# Altium PCB Mictor38AdapterBoard V2.PcbDoc
Units mil, origin at the board's own origin, x right, y up, seen from the top; angles counter-clockwise.
Board outline 1740 x 1180 mil, 2 copper layers (Top Layer, Bottom Layer); 4 components, 38 nets, 106 pads, 47 vias.
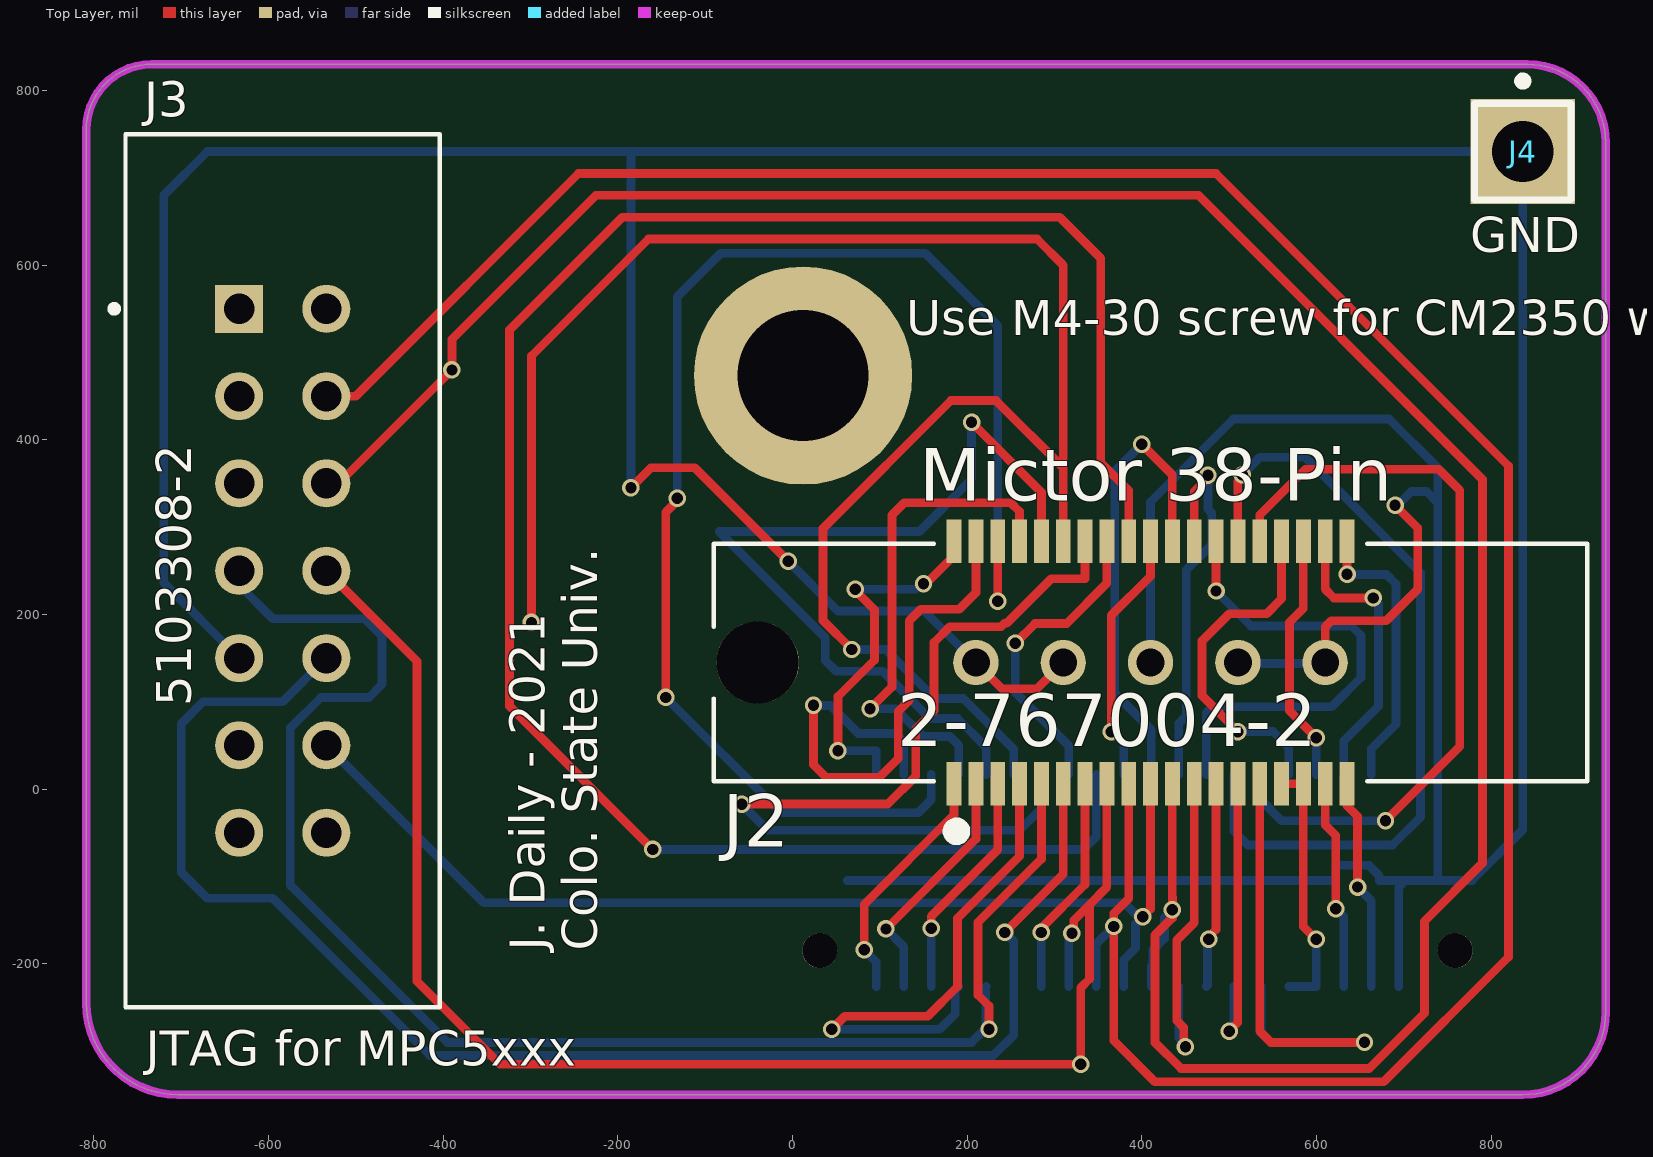
[diagram p0: Top Layer view]
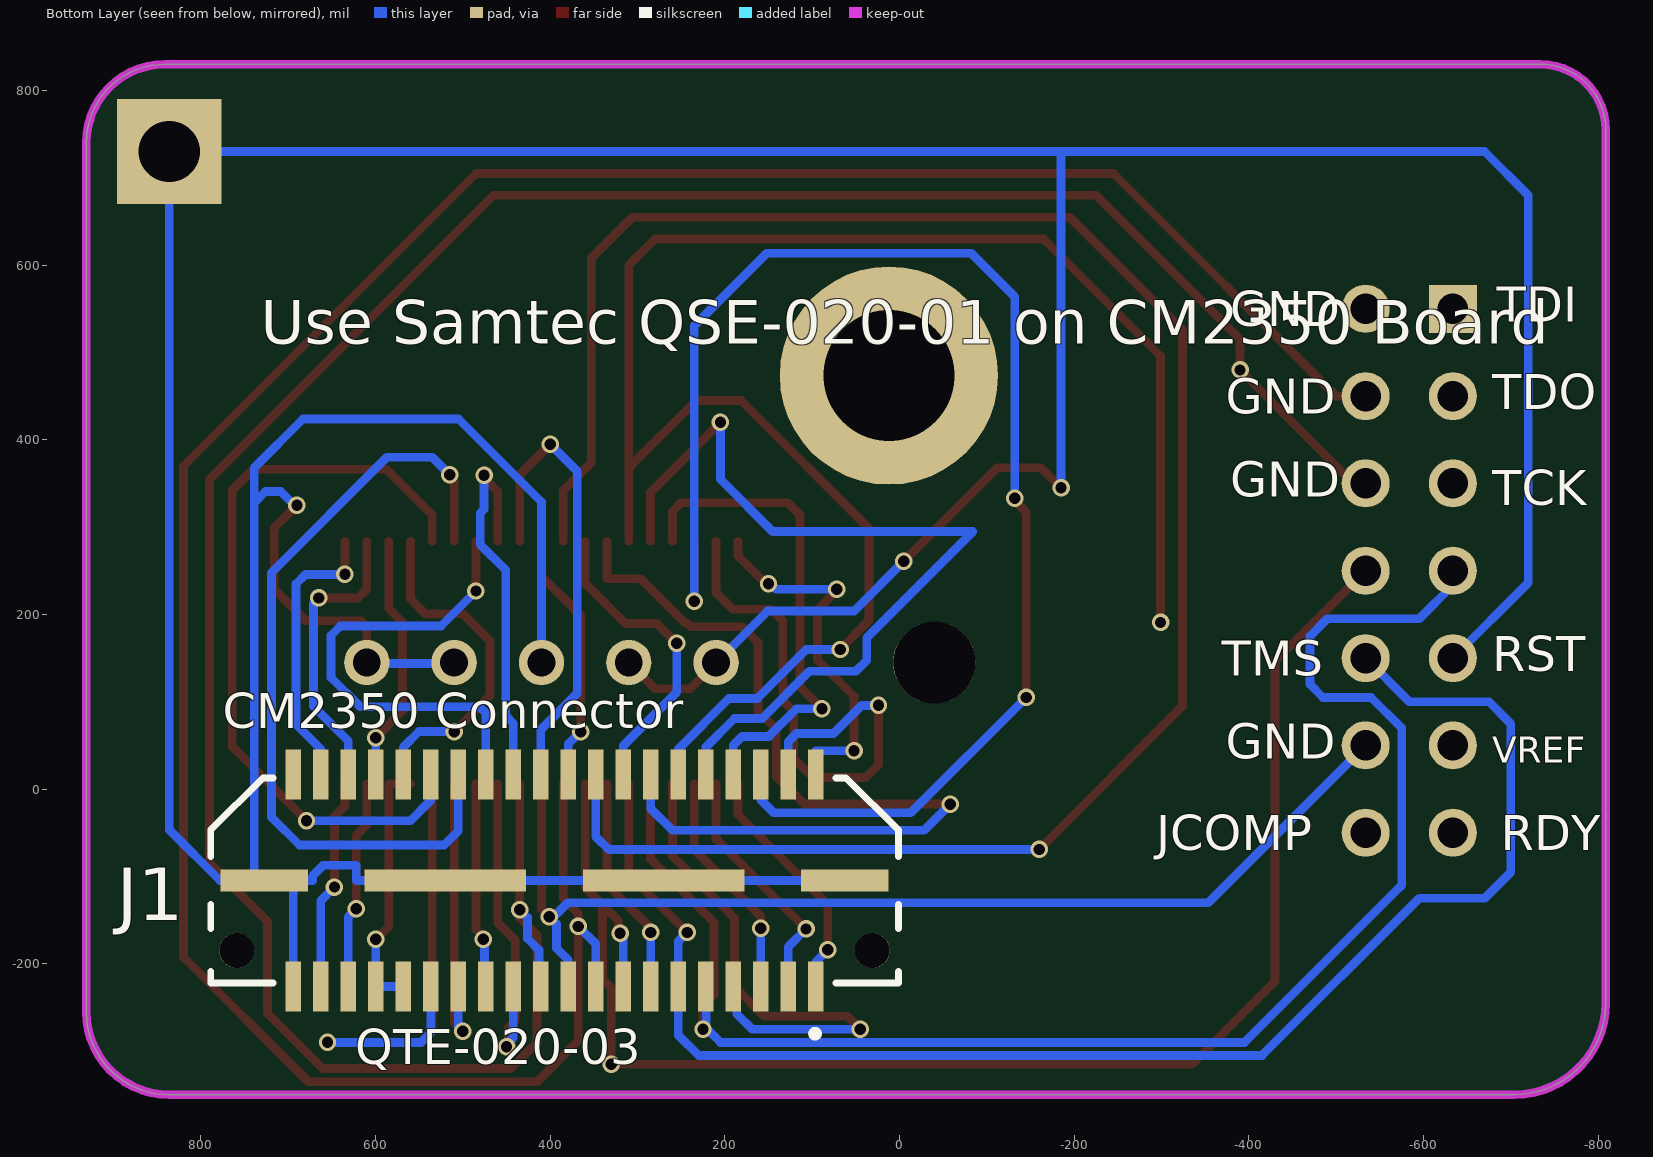
[diagram p1: Bottom Layer view, seen from below]

## Layer stack, top to bottom
Top Solder: solder mask 0.4, Solder Resist, Dk 3.5
Top Layer: signal copper 1.4
Dielectric 1: dielectric 12.6, FR-4, Dk 4.8
Bottom Layer: signal copper 1.4
Bottom Solder: solder mask 0.4, Solder Resist, Dk 3.5

## Board outline
-808.74,-244.92 -808.74,755.08 cw(c-733.74,755.08) -733.74,830.08 841.26,830.08 cw(c841.26,740.08) 931.26,740.08 931.26,-254.92 cw(c836.26,-254.92) 836.26,-349.92 -703.74,-349.92 cw(c-703.74,-244.92)

## Design rules (kind name [scope] priority, off if disabled: settings)
Clearance [All] p1: gap=10 ignorepadtopadclearanceinfootprint=FALSE except(0: Arc-Hole Track-Hole SMDPad-Hole THPad-Hole Via-Hole Fill-Hole Poly-Hole Region-Hole Text-Hole)
PolygonConnect [All] p1: connectstyle=Relief reliefconductorwidth=10 reliefentries=4 polygonreliefangle="90 Angle" airgapwidth=10
RoutingVias [All] p1: holewidth=13 width=20 viastyle="Through Hole" minholewidth=9 minwidth=20 maxholewidth=150 maxwidth=200
SolderMaskExpansion [All] p1: expansion=4 istentingtop=FALSE
Width [All] p1: maxlimit=10 minlimit=10 preferedwidth=10
30 further rules are at their usual default settings.

## Classes and differential pairs
component class Mictor38AdapterSchematic: J1 J2 J4

## Components (designator, comment, footprint, x,y, rotation, side; value= is the part's Value field where it differs from the comment)
J1 "QTE-020-03" SAMTEC_QTE-020-03-X-D-A-K-XX 395.04,-104.61 r0 bottom locked
J2 "2-767004-2" TE_2-767004-2 410,145 r90 top
J3 "5103308-2" TE_5103308-2 -633.74,550.08 r90 top
J4 "Socket" PIN1 836.26,730.08 r0 top

## Footprints (in the part's own frame and the unit in brackets; to place one, negate y for a bottom-side part, rotate by r counter-clockwise, add the part's x,y. Pads: shape width x height; smd on the part's side, far side on the other; paste and mask are expansions set on the pad)
PIN1 [mil] "Connector; Plug"
  rect 120x120 hole 70: 1(0,0)
  silkscreen extent -55,-55 55,86
SAMTEC_QTE-020-03-X-D-A-K-XX [mm]
  rect 0.46x1.45 smd: 01(-7.6,3.085) 02(-7.6,-3.085) 03(-6.8,3.085) 04(-6.8,-3.085) 05(-6,3.085) 06(-6,-3.085) 07(-5.2,3.085) 08(-5.2,-3.085) 09(-4.4,3.085) 10(-4.4,-3.085) 11(-3.6,3.085) 12(-3.6,-3.085) 13(-2.8,3.085) 14(-2.8,-3.085) 15(-2,3.085) 16(-2,-3.085) 17(-1.2,3.085) 18(-1.2,-3.085) 19(-0.4,3.085) 20(-0.4,-3.085) 21(0.4,3.085) 22(0.4,-3.085) 23(1.2,3.085) 24(1.2,-3.085) 25(2,3.085) 26(2,-3.085) 27(2.8,3.085) 28(2.8,-3.085) 29(3.6,3.085) 30(3.6,-3.085) 31(4.4,3.085) 32(4.4,-3.085) 33(5.2,3.085) 34(5.2,-3.085) 35(6,3.085) 36(6,-3.085) 37(6.8,3.085) 38(6.8,-3.085) "39: GND"(7.6,3.085) "40: GND"(7.6,-3.085)
  rect 2.54x0.64 smd: G1(-8.445,0) G4(8.445,0)
  rect 4.7x0.64 smd: G2(-3.175,0) G3(3.175,0)
  round 1.02 hole 1.02 unplated: ""(-9.24,2.04) ""(9.24,2.04)
  silkscreen extent -10,-2.98 10,4.56
TE_2-767004-2 [mm]
  rect 1.27x0.43 smd: 1(-3.53,5.715) 2(3.53,5.715) 3(-3.53,5.08) 4(3.53,5.08) 5(-3.53,4.445) 6(3.53,4.445) 7(-3.53,3.81) 8(3.53,3.81) 9(-3.53,3.175) 10(3.53,3.175) 11(-3.53,2.54) 12(3.53,2.54) 13(-3.53,1.905) 14(3.53,1.905) 15(-3.53,1.27) 16(3.53,1.27) 17(-3.53,0.635) 18(3.53,0.635) 19(-3.53,0) 20(3.53,0) 21(-3.53,-0.635) 22(3.53,-0.635) 23(-3.53,-1.27) 24(3.53,-1.27) 25(-3.53,-1.905) 26(3.53,-1.905) 27(-3.53,-2.54) 28(3.53,-2.54) 29(-3.53,-3.175) 30(3.53,-3.175) 31(-3.53,-3.81) 32(3.53,-3.81) 33(-3.53,-4.445) 34(3.53,-4.445) 35(-3.53,-5.08) 36(3.53,-5.08) 37(-3.53,-5.715) 38(3.53,-5.715)
  round 1.318 hole 0.81: G1(0,5.08) G2(0,2.54) G3(0,0) G4(0,-2.54) G5(0,-5.08)
  round 2.39 hole 2.39 unplated: ""(0,11.43)
  silkscreen extent -5.11,-12.7 3.46,12.7
TE_5103308-2 [mil]
  rect 55x55 hole 35: 1(0,0)
  round 55 hole 35: 2(0,-100) 3(-100,0) 4(-100,-100) 5(-200,0) 6(-200,-100) 7(-300,0) 8(-300,-100) 9(-400,0) 10(-400,-100) 11(-500,0) 12(-500,-100) 13(-600,0) 14(-600,-100)
  silkscreen extent -800,-230 200,147

## Part data
J1: library part QTE-020-03-X-D-A-K-XX, "40 Position Connector Header, Outer Shroud Contacts Surface Mount Gold", Package=None, Availability="In Stock", Check_prices=https://www.snapeda.com/parts/QTE-020-03-F-D-A-K-TR/Samtec/view-part/3359767/?ref=eda, MF=Samtec, MP=QTE-020-03-F-D-A-K-TR, Price=None, Purchase-URL=https://pricing.snapeda.com/search/part/QTE-020-03-F-D-A-K-TR/?ref=eda, SnapEDA_Link=https://www.snapeda.com/parts/QTE-020-03-F-D-A-K-TR/Samtec/view-part/3359767/?ref=snap
J2: "Conn High Speed Fine Pitch Connector RCP 38 POS 2.54mm/0.64mm Solder ST Thru-Hole/SMD Automotive Tube", Package=None, Centerline_Pitch=.64, Digi-Key_Part_Number=A29126-ND, Digi-Key_Purchase_URL=https://www.digikey.com/product-detail/en/te-connectivity-amp-connectors/2-767004-2/A29126-ND/299338?utm_source=snapeda&utm_medium=aggregator&utm_campaign=symbol, EU_RoHS_Compliance="Not Compliant", MF="TE Connectivity", MP=2-767004-2, Number_of_Positions=38, Product_Type=Connector, SnapEDA_Link=https://www.snapeda.com/parts/2-767004-2/TE%20Connectivity%20AMP%20Connectors/view-part/511554/?ref=snap, TE_purchase_URL=https://www.te.com/usa-en/product-2-767004-2.html?te_bu=Cor&te_type=disp&te_campaign=seda_glo_cor-seda-global-disp-prtnr-fy19-seda-model-bom-cta_sma-317_1&elqCampaignId=32493
J3: "Header;  Pin;  Vertical;  Copper Alloy;  Thermoplastic;  14;  0.100 x 0.100 in.;  1 A", Package=None, Availability=Unavailable, MF="TE Connectivity", MP=5103308-2, Price=None, SnapEDA_Link=https://www.snapeda.com/parts/5103308-2/TE%20Connectivity%20AMP%20Connectors/view-part/427979/?ref=snap
J4: LatestRevisionDate=17-Jul-2002, LatestRevisionNote="Re-released for DXP Platform.", Publisher="Altium Limited"

## Free pads (board coordinates)
  round 250 hole 150: 0(12.05,473.62)

## Via types
v1: diameter 20, hole 13, Top Layer to Bottom Layer, 47 vias

## Nets (pads, with @x,y where several pads share a name; then routed paths per layer and width w, separated by ;. In a path a pad name is that pad's centre, name@x,y a point inside that pad or via, vN(x,y) a via of type N, cw(c..) or ccw(c..) an arc to the next point about the centre after c; other vN are vias at no path point)
!EVTI: J1.10 J2.10 | length 1002.4
  Top Layer w10: v1(205,420) 285,340 J2.10
  Bottom Layer w10: v1(205,420) 205,354.86 145.04,294.9 -83.84,294.9 37.63,173.43 37.63,147.31 50.04,134.9 103.33,134.9 157.33,80.9 189.04,80.9 221.81,48.13 J1.10
!EVTO: J1.32 J2.32 | length 394.6
  Top Layer w10: v1(510.04,65.9) 469.04,106.9 469.04,169.9 500.04,200.9 543,200.9 560,217.9 J2.32
  Bottom Layer w10: v1(510.04,65.9) 550.27,65.9 568.27,47.9 J1.32
!MSEI0: J1.38 J2.38 | length 328.4
  Top Layer w10: v1(635,245.9) J2.38
  Bottom Layer w10: v1(635,245.9) 680.04,245.9 691.04,234.9 691.04,74.19 662.76,45.9 J1.38
!MSEO1: J1.36 J2.36 | length 335.2
  Top Layer w10: J2.36 610,228.94 620.04,218.9 v1(665.04,218.9)
  Bottom Layer w10: J1.36 631.26,55.12 671.04,94.9 671.04,212.9 v1(665.04,218.9)
!RDY: J1.14 J2.14 | length 1025.2
  Top Layer w10: v1(-58.11,-17.25) -57.96,-17.1 109.04,-17.1 141.04,14.9 141.04,68.9 162.04,89.9 162.04,167.95 180.04,185.95 238.73,185.95 242.78,190 245.36,190 296.26,240.9 335,240.9 J2.14
  Bottom Layer w10: v1(-58.11,-17.25) -28.26,-47.1 260.04,-47.1 284.8,-22.33 J1.14
!RESET: J1.09 J2.9 J3.7 | length 1784.4
  Top Layer w10: v1(225,-275) 225,-248.3 212.5,-235.8 212.5,-204.32 212.5,-152.6 285,-80.1 J2.9
  Bottom Layer w10: J3.7@-633.74,233.74 -595,195 -490,195 -470,175 -470,120 -485,105 -540,105 -575,70 -575,-110 ; -570,-115 -395,-290 205,-290 v1@220,-275 ; J1.09 221.3,-226.57 221.3,-268.6 225,-272.29 v1(225,-275)
!RSTOUT: J1.25 J2.25 | length 236.7
  Top Layer w10: v1(476.75,-171.75) 476.75,-169.04 485,-160.78 J2.25
  Bottom Layer w10: J1.25 475.26,-224.58 475.26,-173.23 v1(476.75,-171.75)
ARBGRT: J1.29 J2.29 | length 584.3
  Top Layer w10: J2.29 535,-277.29 547.71,-290 v1(655,-290)
  Bottom Layer w10: J1.29 536.77,-279.07 547.71,-290 v1(655,-290)
ARBREQ: J1.35 J2.35 | length 240.9
  Top Layer w10: J2.35 610,-41.06 622.04,-53.1 v1(622.04,-137.1)
  Bottom Layer w10: v1(622.04,-137.1) 631.26,-146.32 J1.35
BOOTCFG1: J1.07 J2.7 | length 607.3
  Top Layer w10: v1(45,-275) 60,-260 155,-260 189.04,-225.96 189.04,-147.77 260,-76.81 J2.7
  Bottom Layer w10: v1(45,-275) 168.69,-275 186.26,-257.43 186.26,-230.12 J1.07
CLKOUT: J1.06 J2.6 | length 1664.6
  Top Layer w10: v1(-145,105) -145,317.16 -131.96,330.2 v1(-131.96,332.9) ; v1(235,215) J2.6
  Bottom Layer w10: v1(-145,105) -12.9,-27.1 143.82,-27.1 158.82,-12.1 J1.06 ; v1(-131.96,332.9) -131.96,563.9 -82.23,613.62 152.05,613.62 235.04,530.63 v1(235,215) v1(235,215)
GND: J1.G1 J1.G2 J1.G3 J1.G4 J2.G1 J2.G2 J2.G3 J2.G4 J2.G5 J3.9 J4.1 | length 6360.5
  Top Layer w10: v1(-185,345) -162.1,367.9 -111.96,367.9 v1(-4.96,260.9) ; J2.G1 240,115 280,115 J2.G2 ; J2.G5 610,185.86 617.1,192.96 680.04,192.96 716.04,228.96 716.04,298.96 v1(690,325)
  Bottom Layer w10: J3.9 -720,236.34 -720,680 -669.92,730.08 -185,730.08 ; v1@-187.71,345 v1(-185,345) -185,730.08 ; v1(-4.96,260.9) 52.08,203.86 151.14,203.86 J2.G1 ; J1.G1 J1.G2 J1.G3 622.04,-104.61 622.04,-87.1 660.04,-87.1 672.04,-99.1 672.04,-104.61 J1.G4@701.85,-104.61 ; J2.G3 410,328.86 505.04,423.9 683.04,423.9 739.04,367.9 739.04,327.9 ; J2.G4 511.13,143.87 608.87,143.87 J2.G5 ; v1(690,325) 692.71,325 708.61,340.9 726.04,340.9 739.04,327.9 ; 694.25,-226.06 694.25,-112.21 J1.G4@701.85,-104.61 ; -185,730.08 J4.1 836.26,-46.39 778.04,-104.61 J1.G4@739.04,-104.61 ; J1.G4@701.85,-104.61 J1.G4 J1.G4@739.04,-104.61 ; J1.G4@739.04,-104.61 739.04,327.9
JCOMP: J1.21 J2.21 J3.6 | length 2991.7
  Top Layer w10: J3.6@-519.92,350.08 v1(-390,480) -390,515 -225,680 465,680 790,355 790,-85 723.74,-151.26 723.74,-256.61 660.36,-320 445,-320 415,-290 415,-167.5 435.04,-147.46 v1(435.04,-138.1) 435.04,-124.14 435,-124.1 J2.21
  Bottom Layer w10: J1.21 410.79,-202.23 412.8,-202.23 412.8,-184.34 426.04,-171.1 426.04,-147.1 v1(435.04,-138.1)
MCKO: J1.34 J2.34 | length 286.5
  Top Layer w10: J2.34 585,206.9 569.04,190.94 569.04,89.63 v1(599.76,58.9)
  Bottom Layer w10: J1.34 v1(599.76,58.9)
MDO0: J1.30 J2.30 | length 885.7
  Top Layer w10: J2.30 535,313.82 587.47,366.3 740.04,366.3 764.04,342.3 764.04,48.9 v1(679.04,-36.1)
  Bottom Layer w10: J1.30 536.77,-12.83 560.04,-36.1 v1(679.04,-36.1)
MDO1: J1.28 J2.28 | length 923.5
  Top Layer w10: J2.28 510,352.29 515,357.29 v1(515,360)
  Bottom Layer w10: J1.28 505.28,-47.92 508.2,-50.85 521.35,-64 687.14,-64 719.04,-32.1 719.04,247.9 587.04,379.9 534.9,379.9 v1(515,360)
MDO2: J1.26 J2.26 | length 556.8
  Top Layer w10: v1(485,226.9) J2.26
  Bottom Layer w10: J1.26 473.78,87.29 480.94,94.45 617.59,94.45 651.04,127.9 651.04,175.9 640.04,186.9 525,186.9 v1(485,226.9)
MDO3: J1.24 J2.24 | length 441.6
  Top Layer w10: J2.24 460,340.8 475.75,356.55 v1(475.75,359.25)
  Bottom Layer w10: J1.24 442.28,75.15 451.04,83.9 451.04,250.9 480.04,279.9 480.04,316.08 475.75,320.37 v1(475.75,359.25)
MDO4: J1.22 J2.22 | length 533.8
  Top Layer w10: v1(400,395) 435,360 J2.22
  Bottom Layer w10: v1(400,395) 369.04,364.04 369.04,109.65 410.79,67.9 J1.22
MDO5: J1.20 J2.20 | length 291.7
  Top Layer w10: v1(365.04,65.9) 365.04,198.94 410,243.9 J2.20
  Bottom Layer w10: v1(365.04,65.9) 379.29,51.65 J1.20
MDO6: J1.18 J2.18 | length 2335.2
  Top Layer w10: v1(-159.96,-69.1) -323.96,94.9 -323.96,526.04 -195,655 305.94,655 353.04,607.9 353.04,373.86 385,341.9 J2.18
  Bottom Layer w10: v1(-159.96,-69.1) 333.04,-69.1 347.8,-54.34 J1.18
MDO7: J1.16 J2.16 | length 357
  Top Layer w10: v1(255.04,166.9) 277.71,189.57 313.67,189.57 360,235.9 J2.16
  Bottom Layer w10: v1(255.04,166.9) 255.04,110.9 316.3,49.64 J1.16
MDO8: J1.08 J2.8 | length 574.3
  Top Layer w10: v1(88.82,91.9) 113.82,116.9 113.82,313.62 128.1,327.9 250,327.9 260,317.9 J2.8
  Bottom Layer w10: v1(88.82,91.9) 118.04,91.9 149.54,60.4 180.04,60.4 190.32,50.13 J1.08
MDO9: J1.05 J2.5 | length 263.6
  Top Layer w10: v1(158.82,-159.32) 158.82,-145.49 235,-69.31 J2.5
  Bottom Layer w10: J1.05 v1(158.82,-159.32)
MDO10: J1.13 J2.13 | length 252.9
  Top Layer w10: v1(284.8,-164.1) 284.8,-159.33 335,-109.14 J2.13
  Bottom Layer w10: J1.13 v1(284.8,-164.1)
MDO11: J1.23 J2.23 | length 385.6
  Top Layer w10: v1(450,-295) 448.09,-293.09 448.09,-273.09 440,-265 440,-173.14 460.04,-153.1 460.04,-64.1 460,-64.06 J2.23
  Bottom Layer w10: J1.23 442.28,-284.58 450,-292.29 v1(450,-295)
MDO12: J1.01 J2.1 | length 280.4
  Top Layer w10: v1(82.04,-184.1) 82.04,-132.1 185,-29.14 J2.1
  Bottom Layer w10: v1(82.04,-184.1) 95.83,-197.88 J1.01
MDO13: J1.02 J2.2 | length 427.6
  Top Layer w10: v1(52.04,43.84) 52.04,106.13 93.82,147.9 93.82,205.24 72.04,227.02 v1(72.04,228.86) ; v1(150,235) 152.56,235 185,267.44 J2.2
  Bottom Layer w10: v1(52.04,43.84) 95.83,43.84 J1.02 ; v1(72.04,228.86) 141.16,228.86 147.29,235 v1(150,235)
MDO14: J1.03 J2.3 | length 283.1
  Top Layer w10: v1(107.04,-160.1) 210,-57.14 J2.3
  Bottom Layer w10: v1(107.04,-160.1) 127.32,-180.38 J1.03
MDO15: J1.04 J2.4 | length 649.6
  Top Layer w10: v1(24.05,95.9) 24.05,27.9 38.54,13.41 99.33,13.41 121.04,35.13 121.04,88.9 133.82,101.68 133.82,192.88 146.88,205.95 191.08,205.95 210,224.86 J2.4
  Bottom Layer w10: v1(24.05,95.9) 43.11,95.9 75.17,63.84 117.82,63.84 127.32,54.33 J1.04
TCK: J1.15 J2.15 J3.8 | length 1749.4
  Top Layer w10: J3.8 -430,146.34 -430,-220 -335,-315 v1(330,-315) 330,-227.36 340.04,-217.32 340.04,-132.38 ; v1(320,-165) 321.91,-163.09 321.91,-150.51 340.04,-132.38 ; J2.15 360,-112.42 340.04,-132.38
  Bottom Layer w10: J1.15 316.3,-171.41 320,-167.71 v1(320,-165)
TD/WDT: J1.27 J2.27 | length 340.9
  Top Layer w10: v1(500,-277.29) 510,-267.29 J2.27
  Bottom Layer w10: v1(500,-277.29) 505.14,-272.16 505.14,-226.2 J1.27
TDI: J1.19 J2.19 J3.12 | length 1255.9
  Top Layer w10: v1(401.04,-146.1) 410,-137.14 J2.19
  Bottom Layer w10: J3.12 -353.66,-130 380,-130 v1@396.1,-146.1 ; J1.19 379.29,-195.73 392.8,-182.23 392.8,-154.34 v1(401.04,-146.1)
TDO: J1.11 J2.11 J3.10 | length 1736.9
  Top Layer w10: v1(243.13,-164.1) 310,-97.23 J2.11
  Bottom Layer w10: J3.10 -583.82,100 -675,100 -700,75 -700,-95 -670.1,-124.9 -595.1,-124.9 -415,-305 230,-305 253.31,-281.69 J1.11 253.31,-174.27 v1(243.13,-164.1)
TMS: J1.17 J2.17 J3.4 | length 3059.2
  Top Layer w10: J3.4@-533.66,450 -500,450 -245,705 485,705 820,370 820,-192.14 677.14,-335 460,-335 ; J2.17 385,-125.24 367.8,-142.45 v1(367.8,-157.23) 367.8,-287.8 415,-335 450,-335
  Bottom Layer w10: J1.17 347.8,-177.23 v1(367.8,-157.23)
UBATT: J1.31 J1.33 J2.31 J2.33 | length 294.7
  Top Layer w10: J2.31 J2.33 585,-157.33 v1(599.76,-172.1)
  Bottom Layer w10: J1.31 J1.33 v1(599.76,-172.1)
VREF: J1.12 J2.12 | length 2079.4
  Top Layer w10: v1(-298.96,190.9) -298.96,496.04 -165,630 279.94,630 310,599.94 310,367.9 ; v1(68.04,159.9) 35.04,192.9 35.04,298.62 181.42,445 232.9,445 310,367.9 ; J2.12 310,367.9
  Bottom Layer w10: v1(68.04,159.9) 106.61,159.9 162.61,103.9 195.24,103.9 253.31,45.84 J1.12
VSTBY: J1.37 J2.37 | length 243.6
  Top Layer w10: J2.37 635,-19.06 647.04,-31.1 v1(647.04,-112.1)
  Bottom Layer w10: v1(647.04,-112.1) 662.76,-127.81 J1.37
pads on no net: "J1.39: GND" "J1.40: GND" J1. J2. J3.1 J3.2 J3.3 J3.5 J3.11 J3.13 J3.14
copper on no net: | length 68.1
  Top Layer w10: -639.92,350.08 -633.74,350.08 ; -533.74,350.08 -519.92,350.08 ; -533.66,450 -533.74,450.08 -512.79,450.08 ; 450,-335 460,-335
  Bottom Layer w10: -575,-110 -570,-115 ; 220,-275 225,-275 ; 396.1,-146.1 401.04,-146.1

## Keep-outs
Keep-Out Layer:
  the board outline again, w10

## Silkscreen, mask and mechanical layers (free items; w line width, h text height)
Top Overlay:
  text "GND" at 776.26,615.08 h40
  text "Use M4-30 screw for CM2350 with a 14mm  (9/16\") spacer." at 130,520 h40
  text "Mictor 38-Pin" at 145,330 h60
  text "J. Daily - 2021 / Colo. State Univ." at -223.74,-184.92 h40 r90
  text "JTAG for MPC5xxx" at -740.74,-316.92 h40
Bottom Overlay:
  text "TDI" at -683.74,535.08 h40
  text "GND" at -378.74,530.08 h40
  text "Use Samtec QSE-020-01 on CM2350 Board" at 731.26,510.08 h50
  text "TDO" at -678.74,435.08 h40
  text "GND" at -373.74,430.08 h40
  text "GND" at -378.74,335.08 h40
  text "TCK" at -678.74,325.08 h40
  text "RST" at -678.74,135.08 h40
  text "TMS" at -368.74,130.08 h40
  text "CM2350 Connector" at 775,70 h40
  text "GND" at -373.74,35.08 h40
  text "VREF" at -678.74,30.08 h30
  text "RDY" at -688.74,-69.92 h40
  text "JCOMP" at -293.74,-69.92 h40